# Altium PCB crosstalk-2.PcbDoc
Units mil, origin at the board's own origin, x right, y up, seen from the top; angles counter-clockwise.
Board outline 2250 x 1480 mil, 2 copper layers (Top Layer, Bottom Layer); 9 components, 4 nets, 18 pads, 5 vias.
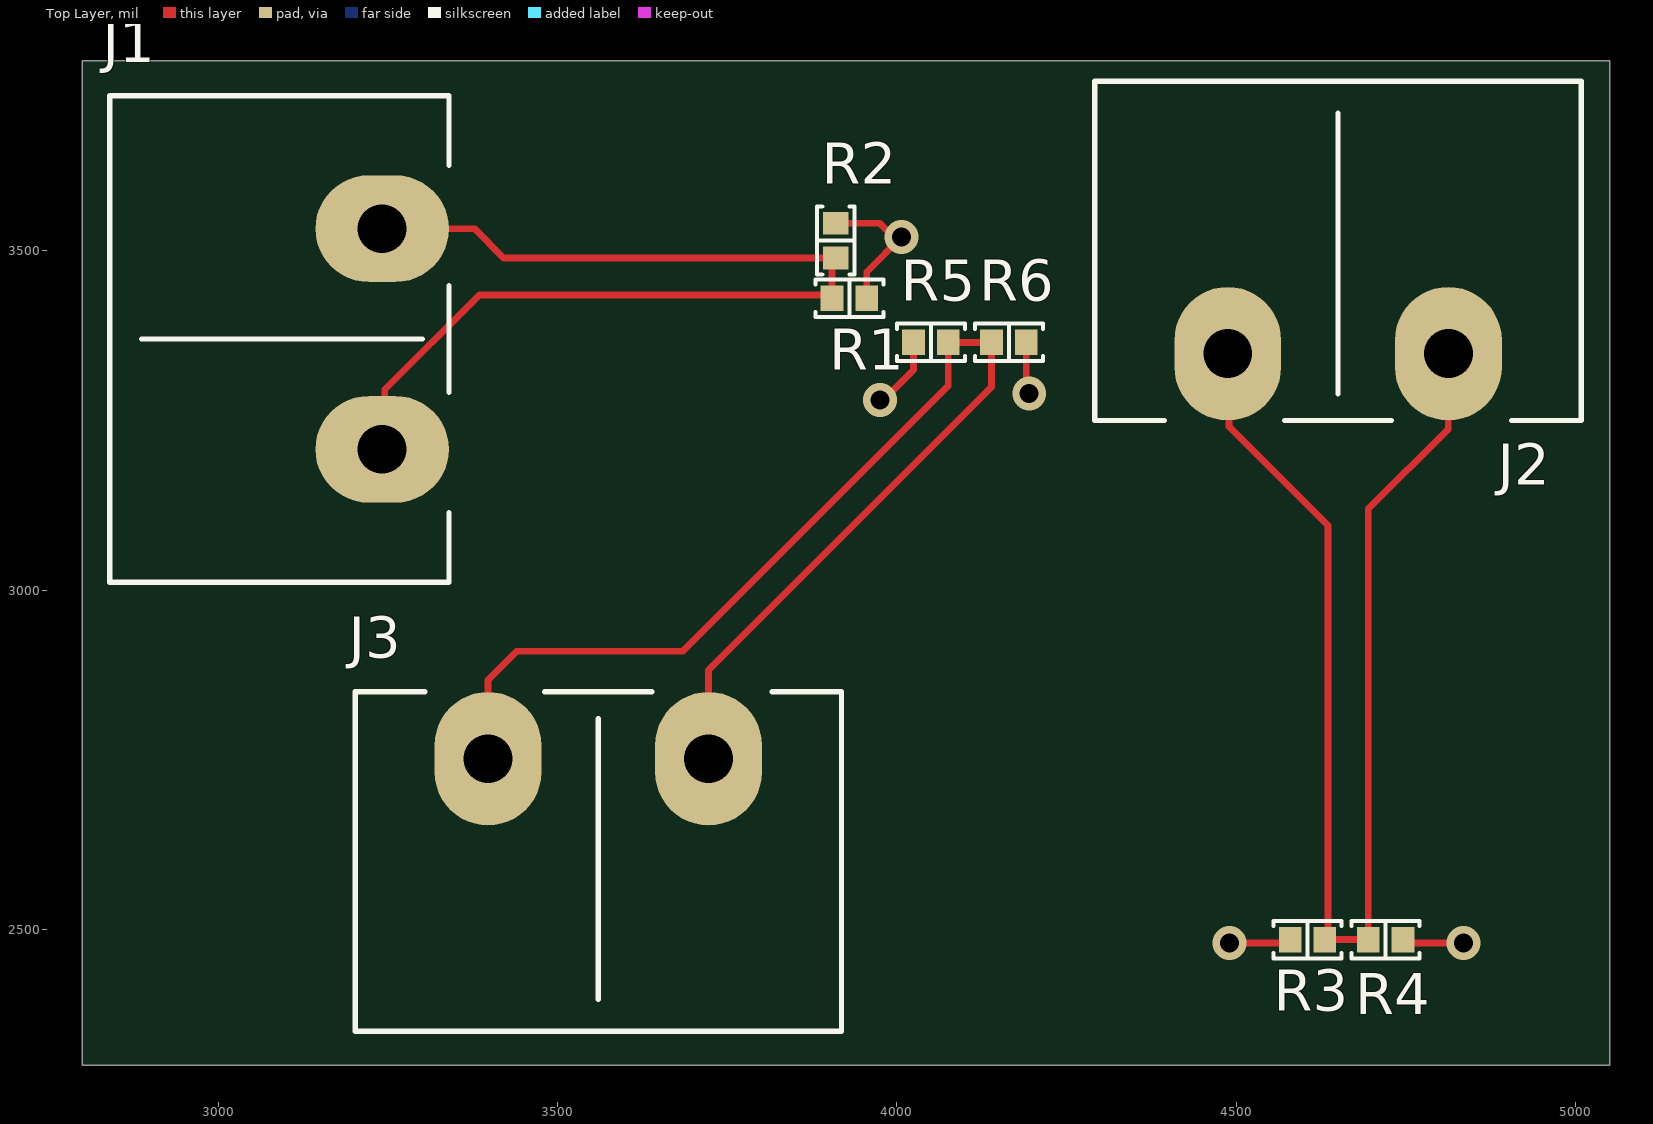
[diagram p0: Top Layer view]
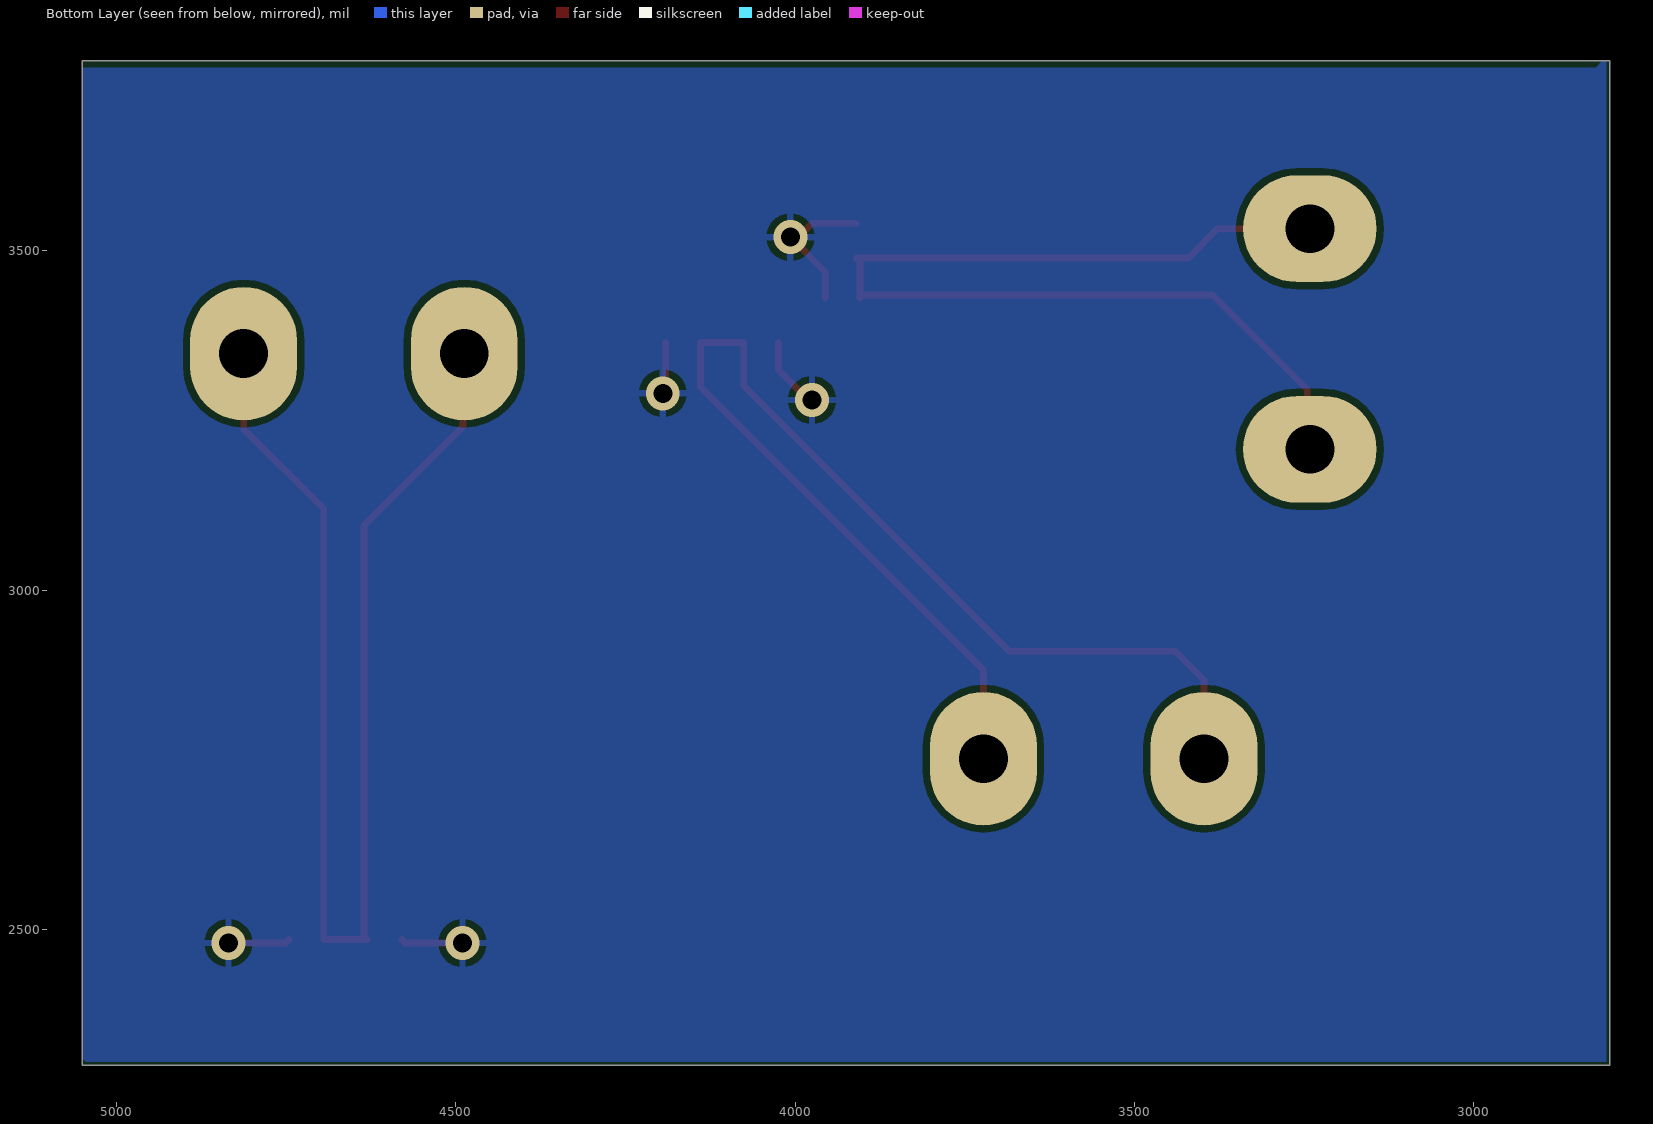
[diagram p1: Bottom Layer view, seen from below]
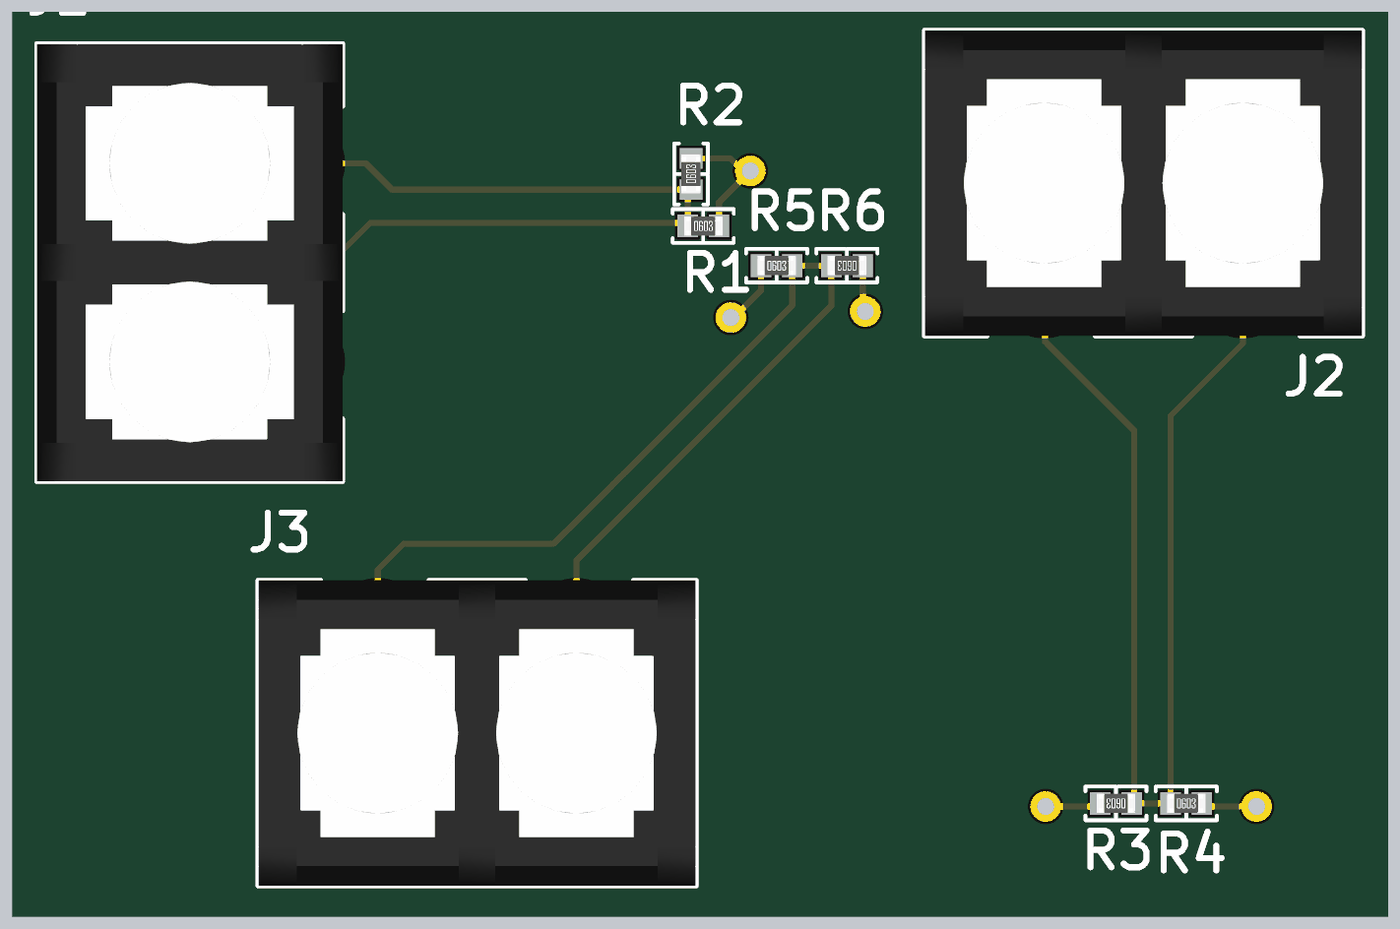
[diagram p2: 3D render of the assembled board from above, using the file's embedded part models]

## Layer stack, top to bottom
Top Solder: solder mask 0.4, Solder Resist, Dk 3.5
Top Layer: signal copper 1.4
Dielectric 1: dielectric 12.6, FR-4, Dk 4.8
Bottom Layer: signal copper 1.4
Bottom Solder: solder mask 0.4, Solder Resist, Dk 3.5

## Board outline
2800,2300 5050,2300 5050,3780 2800,3780

## Design rules (kind name [scope] priority, off if disabled: settings)
Clearance [All] p1: gap=10 ignorepadtopadclearanceinfootprint=FALSE except(0: Arc-Hole Track-Hole SMDPad-Hole THPad-Hole Via-Hole Fill-Hole Poly-Hole Region-Hole Text-Hole)
PolygonConnect [All] p1: connectstyle=Relief reliefconductorwidth=10 reliefentries=4 polygonreliefangle="90 Angle" airgapwidth=10
RoutingVias [All] p1: holewidth=28 width=50 viastyle="Through Hole" minholewidth=28 minwidth=50 maxholewidth=28 maxwidth=50
SolderMaskExpansion [All] p1: expansion=4 istentingtop=FALSE
Width [All] p1: maxlimit=10 minlimit=10 preferedwidth=10
30 further rules are at their usual default settings.

## Components (designator, comment, footprint, x,y, rotation, side; value= is the part's Value field where it differs from the comment)
J1 "4DB-P108-02" "TE 4DB-P108-02" 3090,3370 r90 top
J2 "4DB-P108-02" "TE 4DB-P108-02" 4650,3500 r0 top
J3 "4DB-P108-02" "TE 4DB-P108-02" 3560,2600 r180 top
R1 "1 kOhms" "RES 0603_1608" 3930,3430 r0 top
R2 "1 kOhms" "RES 0603_1608" 3910,3515 r90 top
R3 "1 kOhms" "RES 0603_1608" 4605,2485 r180 top
R4 "1 kOhms" "RES 0603_1608" 4720,2485 r0 top
R5 "1 kOhms" "RES 0603_1608" 4050,3365 r0 top
R6 "1 kOhms" "RES 0603_1608" 4165,3365 r180 top

## Footprints (in the part's own frame and the unit in brackets; to place one, negate y for a bottom-side part, rotate by r counter-clockwise, add the part's x,y. Pads: shape width x height; smd on the part's side, far side on the other; paste and mask are expansions set on the pad)
"RES 0603_1608" [mm] "Chip Resistor, 2-Leads, Body 1.60x0.80mm, IPC Medium Density"
  rect 0.85x0.95 smd: 1(-0.65,0) 2(0.65,0)
  silkscreen extent -1.27,-0.7 1.27,0.7, body extent -0.8,-0.4 0.8,0.4, height 0.45
"TE 4DB-P108-02" [mm] "Assembly, Dual Barrier 4DB P108"
  oval 4x5 hole 1.829: 1(-4.127,-3.85) 2(4.127,-3.85)
  silkscreen extent -9.1,-6.35 9.1,6.35, body extent -9.08,-6.35 9.08,6.35, height 14.48

## Part data
J1 J2 J3: "CONN BARRIER STRIP 2CIRC 0.325\"", Color=Black, Current Rating (Amps)=20A, Manufacturer="TE Connectivity AMP Connectors", Supplier Part Number 1=A98472-ND, Voltage Rating=150V, Barrier Type="2 Wall (Dual)", Bottom Termination="PC Pin", ComponentLink1Description=Datasheet, ComponentLink1URL=https://www.te.com/commerce/DocumentDelivery/DDEController?Action=srchrtrv&DocNm=2-1437667-4&DocType=Customer+Drawing&DocLang=English, ComponentLink2Description="DigiKey Link", ComponentLink2URL=http://digikey.com/product-detail/en/te-connectivity-amp-connectors/4DB-P108-02/A98472-ND/1277921, lastupdated="15/01/2020 04:14:08", Lifecycle Status=Active, Minimum Order=1, Number of Circuits=2, Number of Rows=1, Number of Wire Entries=2, Packaging=Bulk, Part Number=4DB-P108-02, Part Status=Active, Pitch="0.325\" (8.26mm)", price=1.04, series="4DB, Buchanan", Supplier 1=DigiKey, Terminal Block Type="Barrier Block", Top Termination="Screws with Captive Plate", Wire Gauge="12-22 AWG"
R1 R2 R3 R4 R5 R6: library part CPF0603B1K0E, "RES SMD 1K OHM 0.1% 1/16W 0603", Device Package="0603 (1608 Metric)", Manufacturer="TE Connectivity Passive Product", Operating Temperature="-55°C ~ 155°C", Power (Watts)="0.063W, 1/16W", Supplier Device Package=0603, Supplier Part Number 1=A119887CT-ND, Temperature Coefficient=±25ppm/°C, Tolerance=±0.1%, ComponentLink1Description=Datasheet, ComponentLink1URL=https://www.te.com/commerce/DocumentDelivery/DDEController?Action=srchrtrv&DocNm=1773200&DocType=DS&DocLang=English, ComponentLink2Description="DigiKey Link", ComponentLink2URL=https://www.digikey.com/en/products/detail/te-connectivity-passive-product/CPF0603B1K0E/2390473, Composition="Thin Film", Height - Seated (Max)="0.022\" (0.55mm)", lastupdated="18/10/2023 19:36:15", Lifecycle Status=Active, Minimum Order=1, Number of Terminations=2, Package / Case="0603 (1608 Metric)", Packaging=TapeAndReel, Part Number=CPF0603B1K0E, Part Status=Active, partid=4877, price=0.09, Resistance="1 kOhms", series="CPF, Neohm", Size / Dimension="0.061\" L x 0.031\" W (1.55mm x 0.80mm)", Supplier 1=DigiKey

## Via types
v1: diameter 50, hole 28, Top Layer to Bottom Layer, 5 vias

## Nets (pads, with @x,y where several pads share a name; then routed paths per layer and width w, separated by ;. In a path a pad name is that pad's centre, name@x,y a point inside that pad or via, vN(x,y) a via of type N, cw(c..) or ccw(c..) an arc to the next point about the centre after c; other vN are vias at no path point)
DIAG(45): J3.1 J3.2 R5.2 R6.2 | length 1887.8
  Top Layer w10: J3.2 3397.5,2867.5 3440,2910 3685,2910 4075.59,3300.59 R5.2 R6.2 4139.41,3299.41 3722.5,2882.5 J3.1
GND: R1.2 R2.2 R3.2 R4.2 R5.1 R6.1 | length 573.7
  Top Layer w10: R2.2 3974.41,3540.59 3987.35,3527.65 3999.28,3527.65 v1(4006.94,3520) 3955.59,3468.65 R1.2 ; v1(3975,3280) 3980,3280 4024.41,3324.41 R5.1 ; v1@4190.59,3299.41 R6.1 ; v1(4490,2480) 4574.41,2480 R3.2 ; R4.2 4750.59,2480 v1(4835,2480)
  other v1: 4195,3290
HORIZ: J1.1 J1.2 R1.1 R2.1 | length 1554.3
  Top Layer w10: J1.1 3245.38,3211.31 3245.38,3295.38 3385,3435 R1.1@3904.41,3435 ; J1.2 3377.5,3532.5 3420.59,3489.41 R2.1 3904.41,3483.82 R1.1@3904.41,3435 ; R1.1 R1.1@3904.41,3435
VERT: J2.1 J2.2 R3.1 R4.1 | length 1900.7
  Top Layer w10: J2.1 4489.14,3346.78 4489.14,3240.86 4635,3095 R3.1@4635,2485 ; R3.1 R3.1@4635,2485 ; J2.2 4812.5,3237.5 4694.41,3119.41 R4.1 R3.1@4635,2485

## Polygon pours and split planes (outlines as drawn)
GND on Bottom Layer "GND_L02_P000" (solid, pour order 0): 2805,2305 5045,2305 5050,2310 5050,3770 2820,3770 2805,3785